# Altium PCB USB-to-UART2.PcbDoc
Units mm, origin at the board's own origin, x right, y up, seen from the top; angles counter-clockwise.
Board outline 58 x 25 mm, 2 copper layers (Top Layer, Bottom Layer); 24 components, 23 nets, 86 pads, 7 vias.
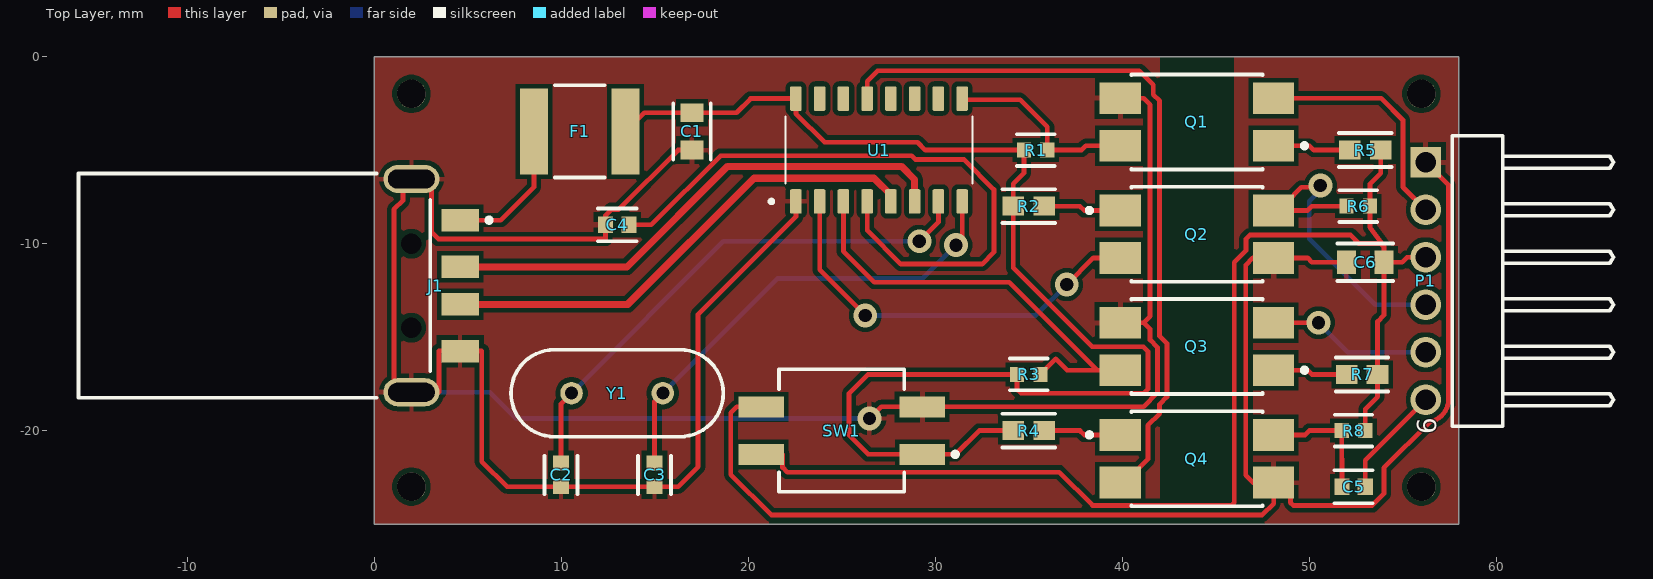
[diagram p0: Top Layer view]
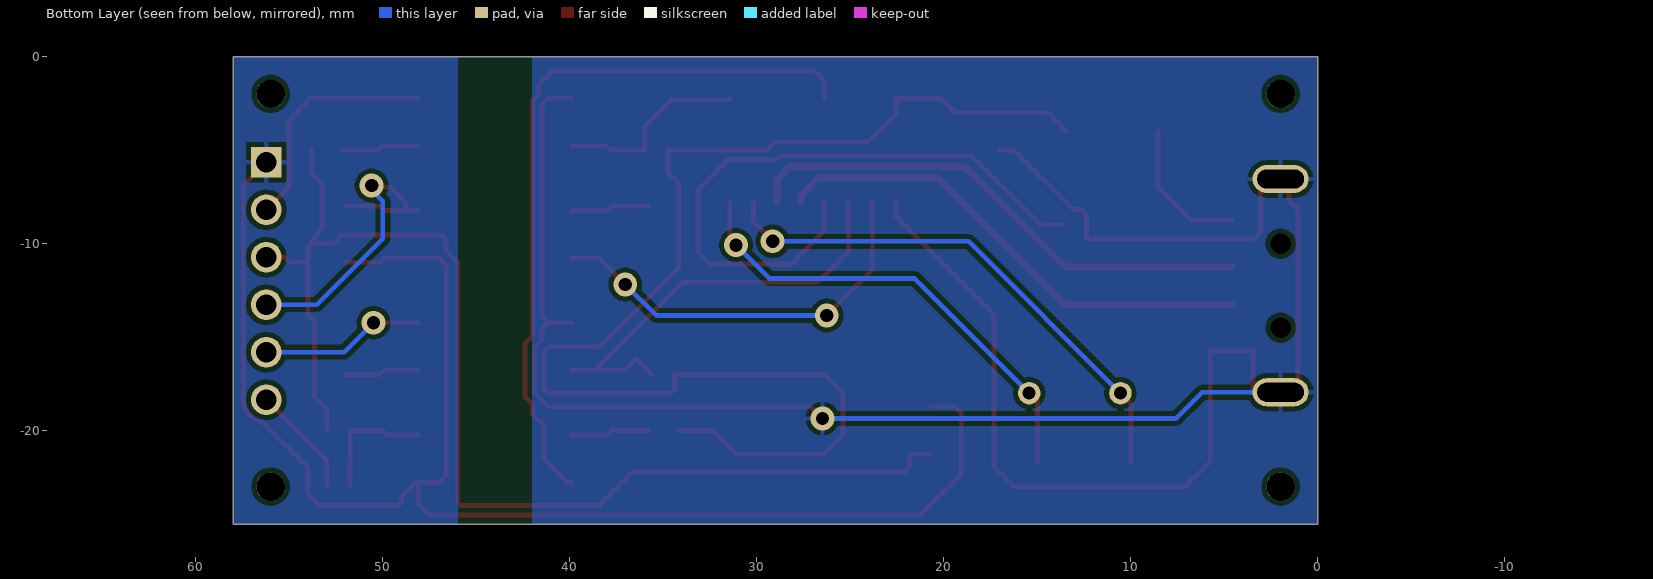
[diagram p1: Bottom Layer view, seen from below]
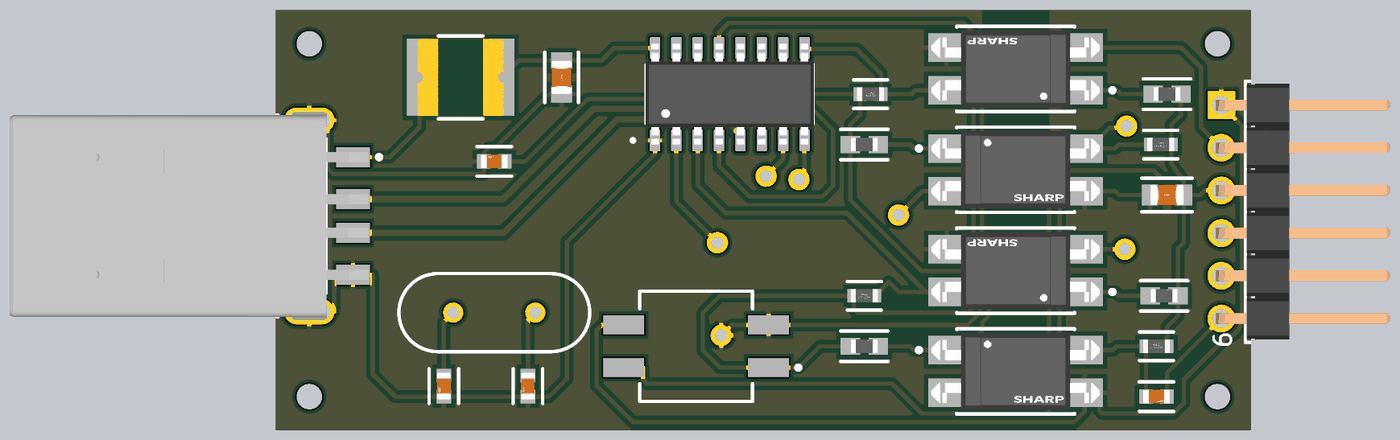
[diagram p2: 3D render of the assembled board from above, using the file's embedded part models]

## Layer stack, top to bottom
Top Solder: solder mask 0.0102, Solder Resist, Dk 3.5
Top Layer: signal copper 0.0356
Dielectric 1: dielectric 0.32, FR-4, Dk 4.8
Bottom Layer: signal copper 0.0356
Bottom Solder: solder mask 0.0102, Solder Resist, Dk 3.5

## Board outline
0,-25 58,-25 58,0 0,0

## Design rules (kind name [scope] priority, off if disabled: settings)
Clearance [All] p1: gap=0.254 ignorepadtopadclearanceinfootprint=FALSE except(0: Arc-Hole Track-Hole SMDPad-Hole THPad-Hole Via-Hole Fill-Hole Poly-Hole Region-Hole Text-Hole)
DiffPairsRouting [All] p1: maxlimit=0.254 minlimit=0.254 mostfreqgap=0.254 toplayer_minwidth=0.381 toplayer_maxwidth=0.381 toplayer_prefwidth=0.381 bottomlayer_minwidth=0.381 bottomlayer_maxwidth=0.381 bottomlayer_prefwidth=0.381 maxuncoupledlength=12.7
PolygonConnect [All] p1: connectstyle=Relief reliefconductorwidth=0.254 reliefentries=4 polygonreliefangle="90 Angle" airgapwidth=0.254
RoutingVias [All] p1: holewidth=0.711 width=1.27 viastyle="Through Hole" minholewidth=0.711 minwidth=1.27 maxholewidth=0.711 maxwidth=1.27
SolderMaskExpansion [All] p1: expansion=0.102 istentingtop=FALSE
UnRoutedNet [All] p1: checkbadconnections=TRUE
Width [All] p1: maxlimit=0.254 minlimit=0.254 preferedwidth=0.254
28 further rules are at their usual default settings.

## Classes and differential pairs
differential pair class DIFF_USB: USB_D
differential pair USB_D: +USB_D_P -USB_D_N

## Components (designator, comment, footprint, x,y, rotation, side; value= is the part's Value field where it differs from the comment)
C1 "10uf" FP-0805P-MFG 17,-4 r270 top
C2 "22p" FP-0603-L_1_6_0_15-W_0_81-IPC_C 10,-22.374 r270 top
C3 "22p" FP-0603-L_1_6_0_15-W_0_81-IPC_C 15,-22.374 r270 top
C4 "10n" FP-0603-L_1_6_0_15-W_0_81-IPC_C 13,-9 r180 top
C5 "100n" FP-0603-L_1_6_0_15-W_0_81-IPC_C 52.374,-23 r0 top
C6 "10u" FP-0805P-MFG 53,-11 r0 top
F1 "MF-SMDF050-2" FP-MF-SMDF-MFG 11,-4 r0 top value=0.2-1Ω
J1 "480-37-1000" MOLX-480-37-1000_V 3.3,-12.25 r270 top
P1 "61300611021" 61300611021 59,-12 r90 top
Q1 "PC817XNNIP0F" FP-PC817XNNIP0F-MFG 44,-3.5 r180 top
Q2 "PC817XNNIP0F" FP-PC817XNNIP0F-MFG 44,-9.5 r0 top
Q3 "PC817XNNIP0F" FP-PC817XNNIP0F-MFG 44,-15.5 r180 top
Q4 "PC817XNNIP0F" FP-PC817XNNIP0F-MFG 44,-21.5 r0 top
R1 "10k" FP-CRGP0603-IPC_C 35.373,-5 r0 top value=10KΩ
R2 "510" FP-CR0603-IPC_A 35,-8 r0 top
R3 "10k" FP-CRGP0603-IPC_C 35,-17 r0 top value=10KΩ
R4 "510" FP-CR0603-IPC_A 35,-20 r0 top
R5 "510" FP-CR0603-IPC_A 53,-5 r0 top
R6 "10k" FP-CRGP0603-IPC_C 52.627,-8 r0 top value=10KΩ
R7 "510" FP-CR0603-IPC_A 52.827,-17 r0 top
R8 "10k" FP-CRGP0603-IPC_C 52.373,-20 r0 top value=10KΩ
SW1 "219-2LPST" CTS-219-2LPST_V 25,-20 r180 top
U1 "CH340G" SOIC127P600X180-16N 27,-5 r90 top
Y1 "12M" FOX-FOXSLF-2_V 13,-18 r0 top

## Footprints (in the part's own frame and the unit in brackets; to place one, negate y for a bottom-side part, rotate by r counter-clockwise, add the part's x,y. Pads: shape width x height; smd on the part's side, far side on the other; paste and mask are expansions set on the pad)
61300611021 [mm] "Pin Header, pitch 2.54 mm, THT, Angled, single row, 6p"
  rect 1.65x1.65 hole 1.1: 1(6.35,2.77)
  round 1.65 hole 1.1: 2(3.81,2.77) 3(1.27,2.77) 4(-1.27,2.77) 5(-3.81,2.77) 6(-6.35,2.77)
  silkscreen extent -7.77,-7.27 7.77,1.34, body extent -7.62,-7.27 7.62,3.09, height 2.58
CTS-219-2LPST_V [mil] "SMD, 4-Leads, Body 6.706x6.553mm, Pitch 2.54mm"
  rect 96x44 smd: 1(-169.5,50) 2(-169.5,-50) 3(169.5,-50) 4(169.5,50)
  silkscreen extent -244,-129 132,129, body extent -132,-129 132,129, height 163
FOX-FOXSLF-2_V [mm] "THD, 2-Leads, Body 11.35x4.65mm, Pitch 4.88mm"
  round 1.2 hole 0.7: 1(-2.44,0) 2(2.44,0)
  silkscreen extent -5.68,-2.32 5.68,2.32, body extent -5.67,-2.32 5.68,2.32, height 3.6
FP-0603-L_1_6_0_15-W_0_81-IPC_C [mm]
  rect 0.807x0.868 smd paste+0 mask+0: 1(-0.626,0) 2(0.626,0)
  silkscreen extent -1.03,-0.88 1.03,0.88, body extent -1.13,-0.58 1.13,0.58, height 0.25
FP-0805P-MFG [mm]
  rect 1x1.25 smd paste+0 mask+0: 1(-1,0) 2(1,0)
  silkscreen extent -1.5,-1 1.5,1, body extent -1.6,-0.82 1.6,0.82, height 0.25
FP-CR0603-IPC_A [mm]
  rect 1.158x1.012 smd paste+0 mask+0: 1(-0.827,0) 2(0.827,0)
  silkscreen extent -1.41,-0.91 1.41,0.91, body extent -1.91,-1.01 1.91,1.01, height 0.25
FP-CRGP0603-IPC_C [mm]
  rect 0.758x0.812 smd paste+0 mask+0: 1(-0.627,0) 2(0.627,0)
  silkscreen extent -1.01,-0.85 1.01,0.85, body extent -1.11,-0.55 1.11,0.55, height 0.25
FP-MF-SMDF-MFG [mm]
  rect 1.5x4.6 smd paste+0 mask+0: 1(-2.45,0) 2(2.45,0)
  silkscreen extent -1.32,-2.47 1.32,2.46, body extent -3.3,-2.57 3.3,2.57, height 0.25
FP-PC817XNNIP0F-MFG [mm]
  rect 2.2x1.7 smd paste+0 mask+0: 1(-4.1,1.27) 2(-4.1,-1.27) 3(4.1,-1.27) 4(4.1,1.27)
  silkscreen extent -5.88,-2.54 3.5,2.54, body extent -5.3,-2.64 5.3,2.64, height 0.25
MOLX-480-37-1000_V [mm] "CONN, 4-Leads, Body 12x18.8mm"
  rect 1.2x2 smd: 1(-3.5,1.3) 2(-1,1.3) 3(1,1.3) 4(3.5,1.3)
  oval 1.5x3 hole 1 slot 2.5 at 90 deg: 5(-5.7,-1.3) 6(5.7,-1.3)
  round 0.5 hole 1.1 unplated: MH1(-2.25,-1.3) MH2(2.25,-1.3)
  silkscreen extent -6,-19.1 6,2.98, body extent -6.35,-19.08 6.35,2.2, height 3.07
SOIC127P600X180-16N [mm]
  rrect25% 1.31x0.62 smd: 1(-2.75,4.445) 2(-2.75,3.175) 3(-2.75,1.905) 4(-2.75,0.635) 5(-2.75,-0.635) 6(-2.75,-1.905) 7(-2.75,-3.175) 8(-2.75,-4.445) 9(2.75,-4.445) 10(2.75,-3.175) 11(2.75,-1.905) 12(2.75,-0.635) 13(2.75,0.635) 14(2.75,1.905) 15(2.75,3.175) 16(2.75,4.445)
  silkscreen extent -2.85,-5 1.78,5.85, body extent -3,-5 3,5, height 1.8

## Part data
C1 C6: library part CMP-2007-04802-2, "CAP CER 10UF 25V X5R 0805", Capacitance=10uF, Case Code (Imperial)=0805, Case Code (Metric)=2012, Dielectric=X5R, Max Operating Temperature=85°C, Min Operating Temperature=-55°C, Package Quantity=1, Tolerance=10%, Voltage Rating=25V, Case/Package=0805, Construction=Flat, Contact Plating=Tin, Depth=1.25mm, Height=1.4mm, Lead Free="Lead Free", Length=2.01mm, Mount="Surface Mount", Number of Pins=2, Packaging="Tape and Reel", Radiation Hardening=No, REACH SVHC="No SVHC", RoHS Compliant=Yes, Series=-, Termination=SMD/SMT, Thickness=0.051inch, Voltage Rating (DC)=25V, Width=0.049inch
C2 C3 C4 C5: library part CMP-2006-04207-3, "General Purpose Ceramic Capacitor, 0603, 22pF, 5%, NP0, 30ppm/°C, 50V", Capacitance=22pF, Case Code (Imperial)=0603, Case Code (Metric)=1608, Dielectric=C0G, Dielectric Material=Ceramic, Insulation Resistance=100GR, Max Operating Temperature=125°C, Min Operating Temperature=-55°C, Package Quantity=1, Temperature Coefficient=30ppm/°C, Tolerance=5%, Voltage=50V, Case/Package=0603, Contact Plating=Tin, Depth=0.81mm, Height=0.63mm, Lead Free="Lead Free", Length=1.6mm, Mount="Surface Mount", Number of Pins=2, Packaging="Tape and Reel", Radiation Hardening=No, REACH SVHC="No SVHC", RoHS Compliant=Yes, Termination=SMD/SMT, Thickness=0.035inch, Voltage Rating=50V, Voltage Rating (DC)=50V, Width=0.81mm
F1: library part CMP-07400-000008-1, "PTC RESET FUSE 60V 550MA 2018", Ambient Temperature Range High=+85°C, Ambient Temperature Range Low=-40°C, Current Rating=10A, Hold Current=0.55A, Manufacturer="Bourns Inc.", Package=MF-SMDF, Resistance=0.2-1Ω, Temperature="-40°C to +85°C", Trip Current=1.2A, Voltage Rating=60V, Automotive=No, Category=Fuse, ComponentLink2Description=Datasheet, ComponentLink2URL=https://bourns.com/data/global/pdfs/MFSMDF.pdf, Device Class L1="Circuit Protection", Device Class L2="PTC Resettable Fuses", Device Class L3=unset, Digikey Description="PTC RESET FUSE 60V 550MA 2018", Height=1.09mm, Lead Free=Yes, Manufacturer Part Number=MF-SMDF050-2, Mouser Description="Resettable Fuses - PPTC 0.55A 60V 0.2ohm Hold 0.55A Trip1.2a", Octopart=https://octopart.com/mf-smdf050-2-bourns-94955, RoHS=TRUE, Temperature Range High=+85°C, Temperature Range Low=-40°C, Trip Time=3s
J1: library part CMP-1676-00005-1, "Universal Serial Bus (USB) Shielded I/O Plug, Type A, Right Angle Connector, 1.5 A, -20 to 85 degC, 4-Pin SMD, RoHS, Tray", Case Code (Imperial)=0603, Case Code (Metric)=1608, Max Operating Temperature="155 degC", Min Operating Temperature="-55 degC", Package Quantity=5000, Power Rating="100 mW", Resistance="1 mohm", Tolerance=1%, Voltage Rating="50 V", Case\Package=0603, ComponentLink1Description="Manufacturer URL", ComponentLink1URL=http://www.molex.com/, ComponentLink2Description=Datasheet, ComponentLink2URL=http://www.molex.com/pdm_docs/sd/480371000_sd.pdf, DatasheetVersion="Rev. D, 06/2004", Height="0.45 mm", Length="1.6 mm", Mount="Surface Mount", PackageDescription="4-Pin Surface Mount Device, Body 12 x 18.8 mm", PackageReference=480-37-1000, Packaging="Tape and Reel", Pins=2, REACH SVHC="No SVHC", RoHSCompliant=true, Voltage Rating (DC)="50 V", Width="0.8 mm"
P1: library part CMP-1502-01069-1, "THT Angled Pin Header WR-PHD, Pitch 2.54 mm, Single Row, 6 pins", Contact Resistance=20mOhm, Manufacturer="Wurth Elektronik", Operating Temperature=-40to105degC, Rated Current=3A, Withstanding Voltage=500VAC, Working Voltage=250VAC, Datasheet URL=https://katalog.we-online.de/em/datasheet/6130xx11021.pdf, Gender=Male, Manufacturer URL=http://www.we-online.de, Mounting Technology=THT, Orientation=Angled, Package Reference=61300611021, Packaging=Bag, Part Number=61300611021, Pin Number=6, Pitch=2.54mm, Publisher=WurthElektronik, Row Number=Single
Q1 Q2 Q3 Q4: library part CMP-65434-000005-1, "OPTOISOLATOR 5KV TRANS 4SMD", Case/Package=SMD/SMT, Collector Emitter Saturation Voltage=200mV, Collector Emitter Voltage (VCEO)=80V, Forward Current=50mA, Forward Voltage=1.4V, Isolation Voltage=5kV, Max Operating Temperature=100°C, Max Power Dissipation=200mW, Min Operating Temperature=-30°C, Output Current per Channel=30mA, Package Quantity=2000, Reverse Breakdown Voltage=6V, Collector-emitter Voltage-Max=200mV, Contact Plating=Copper, Fall Time=18000ns, Input Current=50mA, Input Type=DC, Isolation Voltage-Max=5kV, Lead Free="Lead Free", Max Collector Current=50mA, Max Input Current=50mA, Max Output Voltage=80V, Mount="Surface Mount", Number of Channels=1, Number of Elements=1, Number of Pins=4, Output Voltage=80V, Packaging="Tape and Reel", Power Dissipation=200mW, Radiation Hardening=No, Rise Time=18000ns, RoHS Compliant=Yes
R1 R3 R6 R8: library part CMP-03211-004414-1, "CRGP 0603 10K 1%", Ambient Temperature Range High=+70°C, Manufacturer=TE, Manufacturer Part Number=CRGP0603F10K, Package=CRGP0603, Power Rating=0.25W, Resistance=10KΩ, Temperature="-55°C to +155°C", Temperature Coefficient=±100ppm/°C, Temperature Range High=+155°C, Temperature Range Low=-55°C, Tolerance=0.01, Voltage Rating=50V, Automotive=No, Category=Res, ComponentLink2Description=Datasheet, ComponentLink2URL=https://www.te.com/commerce/DocumentDelivery/DDEController?Action=srchrtrv&DocNm=9-1773463-9&DocType=DS&DocLang=English, Composition="Thick Film", Device Class L1="Passive Components", Device Class L2=Resistors, Device Class L3="Chip SMD Resistors", Digikey Description="CRGP 0603 10K 1%", Height=0.55mm, Ipc Land Pattern Name=RESC16080X45, Lead Free=Yes, Mouser Description="Res, 10K, 1%, 0.25W, 0603, Thick Film", Octopart=https://octopart.com/crgp0603f10k-te+connectivity-91018721, RoHS=TRUE, Series=CRGP
R2 R4 R5 R7: library part CMP-07231-001773-1, "Thick Film Chip Resistors 0603 510Ω 0.1W 1% 100ppm/°C", Case Code (Imperial)=0603, Case Code (Metric)=1608, Max Operating Temperature=155°C, Min Operating Temperature=-55°C, Package Quantity=5000, Power Rating=100mW, Resistance=510R, Temperature Coefficient=100ppm/°C, Tolerance=1%, Voltage Rating=50V, Case/Package=0603, Composition="Thick Film", Contact Plating=Tin, Height=0.45mm, Length=1.6mm, Mount="Surface Mount", Packaging="Tape and Reel", Radiation Hardening=No, Termination=SMD/SMT, Thickness=457um, Width=0.8mm
SW1: library part CMP-2000-05532-1, "Surface Mount DIP Switch Auto Placeable, -55 to 85 degC, 4-Pin SMD, RoHS, Tube", Manufacturer="CTS Corporation", Package Description="4-Pin Surface Mount Device, Body 6.7 x 6.55 mm", Actuator Style=LowProfile, Circuitry=SPST, Datasheet URL=http://www.ctscorp.com/wp-content/uploads/2016/01/219-Dec-30-2008.pdf, Datasheet Version=12/2008, Manufacturer URL=http://www.ctscorp.com/, Mounting Technology=SurfaceMount, No of Positions=2, Package Reference=219-2LPST, Sealed Option=Sealed, Termination Style=GullWing, Type=Dip
U1: "USB Interface Integrated Circuit", Package=None, Availability="Not in stock", Check_prices=https://www.snapeda.com/parts/Ch340G/WCH/view-part/?ref=eda, MF=WCH, MP=Ch340G, Price=None, SnapEDA_Link=https://www.snapeda.com/parts/Ch340G/WCH/view-part/?ref=snap
Y1: library part CMP-1749-00004-1, "Resistance Weld Thru-Hole Crystal, 12 MHz, +/-30 ppm, -20 to 70 degC, 2-Pin THD, RoHS, Bulk", Case\Package=TO-251-3, Input Capacitance="350 pF", Max Operating Temperature="150 degC", Max Power Dissipation="2.5 W", Min Operating Temperature="-55 degC", Package Quantity=70, ComponentLink1Description="Manufacturer URL", ComponentLink1URL=http://www.foxonline.com/, ComponentLink2Description=Datasheet, ComponentLink2URL=http://www.foxonline.com/pdfs/hc49slf.pdf, DatasheetVersion=Mar-15, Elements=1, Height="6.1 mm", Length="6.6 mm", Mount="Through Hole", PackageDescription="2-Pin Through Hole Device, Body 11.35 x 4.65 mm, Pitch 4.88 mm", PackageReference=FOXSLF-2, Packaging=Rail/Tube, Pins=3, Radiation Hardening=No, Rds On Max="115 mohm", REACH SVHC="No SVHC", RoHSCompliant=true, Typical Rise Time="90 ns", Width="2.3 mm"

## Free pads (board coordinates)
  round 1.524 hole 1.524 unplated: 2(2,-2) 3(56,-23) 4(56,-2) 5(2,-23)

## Via types
v1: diameter 1.27, hole 0.711, Top Layer to Bottom Layer, 7 vias

## Nets (pads, with @x,y where several pads share a name; then routed paths per layer and width w, separated by ;. In a path a pad name is that pad's centre, name@x,y a point inside that pad or via, vN(x,y) a via of type N, cw(c..) or ccw(c..) an arc to the next point about the centre after c; other vN are vias at no path point)
+5: C1.1 F1.2 R1.1 R2.1 R3.1 R4.1 SW1.1 U1.16 | length 70.6
  Top Layer w0.254: F1.2 14.45,-3 C1.1 19.38,-3 20.13,-2.25 U1.16 22.555,-3.048 24.089,-4.582 29.058,-4.582 29.476,-5 R1.1 34.746,-6.234 34.173,-6.807 R2.1 34.173,-11.303 38.389,-15.519 41.138,-15.519 41.381,-15.762 41.381,-17.778 41.15,-18.009 34.595,-18.009 34.373,-17.787 R3.1 26.416,-17 25.4,-18.016 25.4,-20.254 26.416,-21.27 SW1.1 31.09,-21.27 32.36,-20 R4.1
CTS: Q1.4 R1.2 U1.9 | length 10.4
  Top Layer w0.254: U1.9 31.445,-2.311 34.544,-2.311 36,-3.767 R1.2 37.821,-5 38.051,-4.77 Q1.4
DTR: Q4.2 U1.13 | length 39.5
  Top Layer w0.254: U1.13 26.365,-1.321 26.924,-0.762 40.921,-0.762 41.669,-1.511 41.669,-2.033 42,-2.364 42,-14.944 42.397,-15.341 42.397,-18.199 42,-18.596 42,-19.104 41.381,-19.723 41.381,-21.539 40.15,-22.77 Q4.2
GND: C1.2 C2.2 C3.2 C4.2 J1.4 J1.5 J1.6 Q1.3 Q3.3 SW1.2 U1.1 | length 134.3
  Top Layer w0.254: C1.2 16.256,-5 13.077,-8.179 12.7,-8.179 12.374,-8.505 C4.2 12.374,-9.754 3.429,-9.754 3.073,-9.398 3.073,-6.55 J1.5 1.549,-6.55 1.549,-7.696 1.067,-8.179 1.067,-17.95 J1.6 3.48,-17.95 3.48,-15.75 J1.4 5.766,-15.75 5.766,-21.654 7.112,-23 C2.2 C3.2 16.256,-23 17.323,-21.933 17.323,-13.792 22.555,-8.56 U1.1 ; v1(26.492,-19.355) 27.117,-18.73 41.147,-18.73 41.889,-17.988 41.889,-15.552 41.492,-15.155 41.492,-14.574 41.148,-14.23 ; Q3.3 41.148,-14.23 ; Q1.3 41.148,-2.23 41.492,-2.574 41.492,-13.886 41.148,-14.23
  Bottom Layer w0.254: J1.6 6.198,-17.95 7.602,-19.355 v1(26.492,-19.355)
GNDIO: C6.1 P1.1 Q2.3 Q4.3 SW1.3 | length 81.5
  Top Layer w0.254: SW1.3 19.395,-18.73 19.075,-19.05 19.075,-22.352 21.232,-24.509 47.491,-24.509 48.1,-23.9 Q4.3 Q4.3@48.082,-22.77 ; C6.1 50.141,-11 49.911,-10.77 Q2.3 46.99,-10.77 46.609,-11.151 46.609,-22.389 46.99,-22.77 Q4.3@48.082,-22.77 ; P1.1 57.455,-6.875 57.455,-18.447 57.455,-18.545 ccw(c57.644,-18.715) 57.398,-18.65 cw(c56.23,-18.35) 56.468,-19.532 54,-22 54,-23.376 53.376,-24 52,-24 49.148,-24 49,-23.851 49,-23.493 48.277,-22.77 Q4.3@48.082,-22.77
MCU_XI: C2.1 U1.7 Y1.1 | length 28.5
  Top Layer w0.254: C2.1 10,-18.56 Y1.1 ; v1(29.159,-9.881) 30.175,-8.865 U1.7
  Bottom Layer w0.254: Y1.1 18.679,-9.881 v1(29.159,-9.881)
MCU_XO: C3.1 U1.8 Y1.2 | length 25.4
  Top Layer w0.254: C3.1 15,-18.44 Y1.2 ; v1(31.115,-10.084) 31.445,-9.754 U1.8
  Bottom Layer w0.254: Y1.2 21.578,-11.862 29.337,-11.862 v1(31.115,-10.084)
NetC4_1: C4.1 U1.4 | length 34.5
  Top Layer w0.254: C4.1 14.825,-9 18.526,-5.299 28.743,-5.299 28.956,-5.512 31.547,-5.512 33.147,-7.112 33.147,-10.465 32.512,-11.1 28.168,-11.1 26.365,-9.296 U1.4
NetC5_1: C5.1 Q4.4 R8.1 | length 6.7
  Top Layer w0.254: Q4.4 49.784,-20.23 50.014,-20 R8.1 51.746,-21.512 51.748,-21.514 C5.1
NetC5_2: C5.2 P1.6 | length 6
  Top Layer w0.254: C5.2 53,-21.58 P1.6
NetF1_1: F1.1 J1.1 | length 7.7
  Top Layer w0.254: J1.1 6.782,-8.75 8.55,-6.982 F1.1
NetP1_2: P1.2 Q1.2 | length 12.7
  Top Layer w0.254: Q1.2 53.848,-2.23 55.016,-3.398 55.016,-6.976 P1.2
NetP1_4: P1.4 Q2.4 R6.1 | length 17.4
  Top Layer w0.254: Q2.4 Q2.4@48.77,-8.23 ; v1(50.6,-6.9) 50.504,-6.996 49.584,-6.996 48.77,-7.81 Q2.4@48.77,-8.23 ; R6.1 50.141,-8 49.911,-8.23 Q2.4@48.77,-8.23
  Bottom Layer w0.254: v1(50.6,-6.9) 50.6,-7.137 50,-7.737 50,-9.741 53.529,-13.27 P1.4
NetP1_5: P1.5 Q3.2 | length 8.8
  Top Layer w0.254: Q3.2 v1(50.495,-14.23)
  Bottom Layer w0.254: v1(50.495,-14.23) 52.075,-15.81 P1.5
NetQ1_1: Q1.1 R5.1 | length 4.2
  Top Layer w0.254: Q1.1 50.013,-4.77 50.243,-5 R5.1
NetQ2_1: Q2.1 R2.2 | length 4.2
  Top Layer w0.254: R2.2 37.744,-8 37.974,-8.23 Q2.1
NetQ3_1: Q3.1 R7.1 | length 4
  Top Layer w0.254: Q3.1 49.911,-16.77 50.141,-17 R7.1
NetQ4_1: Q4.1 R4.2 | length 4.2
  Top Layer w0.254: R4.2 37.744,-20 37.974,-20.23 Q4.1
RXD: Q3.4 R3.2 U1.3 | length 23.7
  Top Layer w0.254: U1.3 25.095,-10.414 26.746,-12.065 33.96,-12.065 38.665,-16.77 ; R3.2 36.456,-16.171 37.055,-16.77 38.665,-16.77 ; Q3.4 38.665,-16.77
TXD: Q2.2 U1.2 | length 22
  Top Layer w0.254: U1.2 23.825,-11.405 v1(26.263,-13.843) ; v1(37.033,-12.192) 38.455,-10.77 Q2.2
  Bottom Layer w0.254: v1(26.263,-13.843) 35.382,-13.843 v1(37.033,-12.192)
USB_D_N: J1.2 U1.6 | length 28
  Top Layer w0.381: J1.2 13.525,-11.25 18.905,-5.87 28.202,-5.87 28.905,-6.574 U1.6
USB_D_P: J1.3 U1.5 | length 26.5
  Top Layer w0.381: J1.3 13.57,-13.25 20.315,-6.505 26.735,-6.505 27.635,-7.405 U1.5
VCC: C6.2 P1.3 R5.2 R6.2 R7.2 R8.2 SW1.4 | length 67
  Top Layer w0.254: SW1.4 21.844,-21.27 21.844,-21.971 22.098,-22.225 36.643,-22.225 38.418,-24 38.641,-24 38.642,-24.001 45.85,-24.001 46,-23.851 46,-11 46.619,-10.381 46.619,-9.762 46.842,-9.539 52.203,-9.539 52.664,-10 53.84,-10 54,-10.16 C6.2 ; R8.2 53,-18.847 53.654,-18.193 R7.2 53.654,-14.173 54,-13.827 C6.2 ; R5.2 53.827,-6.234 53.254,-6.807 R6.2 53.254,-9.135 53.869,-9.979 ; P1.3 55.236,-10.73 54.966,-11 C6.2
pads on no net: J1.MH1 J1.MH2 U1.10 U1.11 U1.12 U1.14 U1.15

## Polygon pours and split planes (outlines as drawn)
GND on Top Layer "GND_L01_P000" (solid, pour order 0): 0,-25 42,-25 42,0 0,0
GNDIO on Top Layer "GNDIO_L01_P002" (solid, pour order 2): 58,-25 46,-25 46,0 58,0
GND on Bottom Layer "GND_L02_P003" (solid, pour order 3): 0,-25 0,0 42,0 42,-25
GNDIO on Bottom Layer "GNDIO_L02_P004" (solid, pour order 4): 58,-25 46,-25 46,0 58,0

## Silkscreen, mask and mechanical layers (free items; w line width, h text height)
Mechanical 1:
  the board outline again, w0.127

## Text inside footprints (layer, text, board x,y; h text height)
J1: Mechanical 1 "PCB EDGE" at -0.54,-13.52 h0.5 r270
P1: Top Overlay "6" at 56.8,-20.19 h1.02 r90